# EAGLE board Tiny Tetris v1.2 (EAGLE 7.0.0)
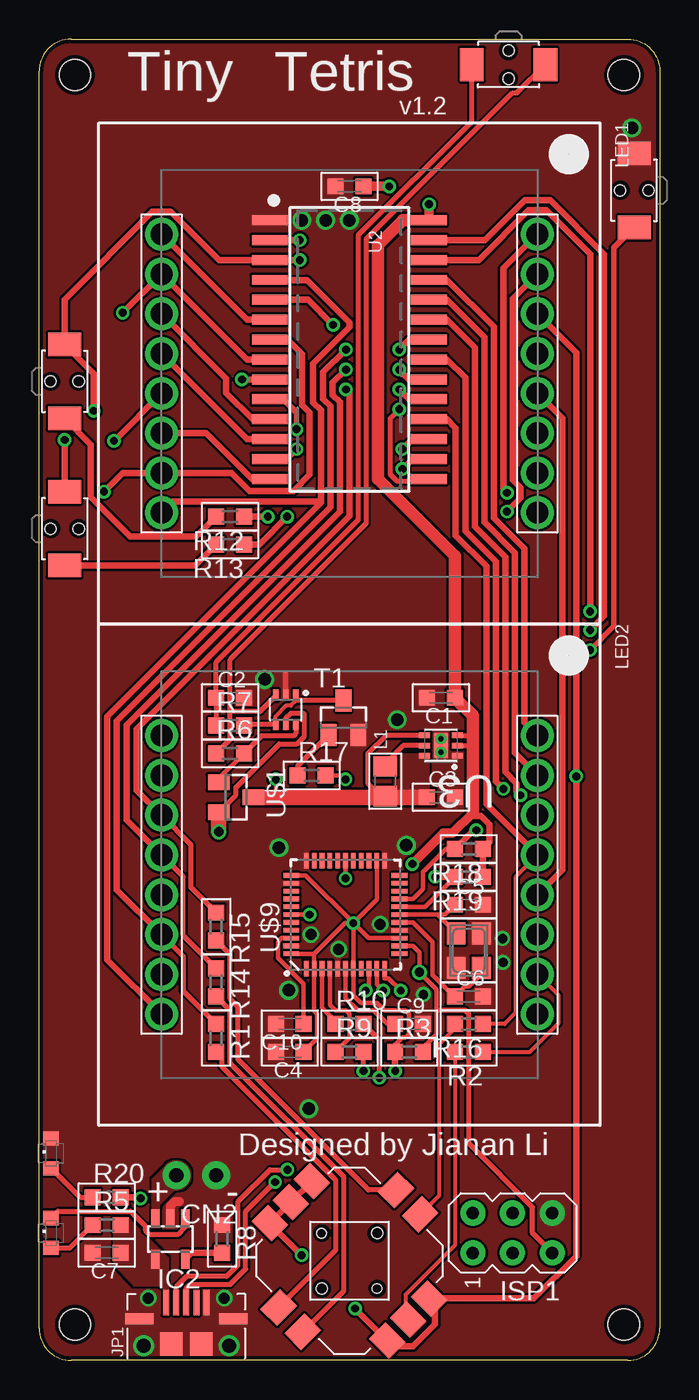
[diagram p0: board, top side]
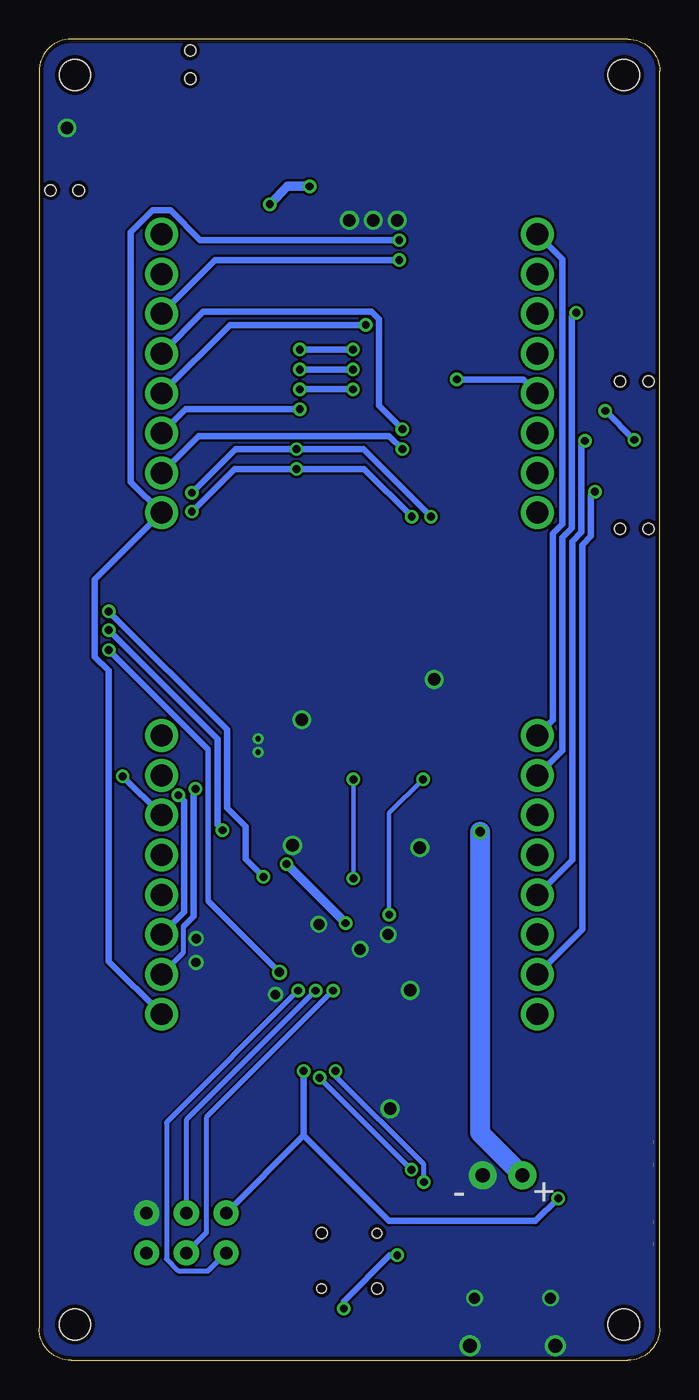
[diagram p1: board, bottom side, seen from below]

Size 39.62 x 84.33 mm. Coordinates in mm from the lower left corner, seen from the top.
Outline: 0,2.03 0,82.3 arc-90 2.03,84.33 37.59,84.33 arc-90 39.62,82.3 39.62,2.03 arc-90 37.59,0 2.03,0 arc-90 0,2.03
Copper layers (1*16): Top 0.0356mm / dielectric 1.5011mm / Bottom 0.0356mm
Design rules "OSH Park *": minimum track width 6mil, minimum drill 13mil, track to track 6mil, track to pad 6mil, pad to pad 6mil, via to via 6mil, smd to smd 6mil, copper to edge 10mil, drill to drill 6mil, minimum pad ring 7mil, minimum via ring 7mil, stop-mask expansion 0mil, vias tented up to drill 40mil, thermal gap 10mil
Holes 2 mm at 37.34,2.29 37.34,82.04 2.29,2.29 2.29,82.04

## Footprints (pad centres in the part's own frame; a part is rotated, then mirrored left to right if it is on the bottom)
TACT-ALPS-SKRELGE010 = smd 1.5 x 2.1: P$1 -2.35,0; P$2 2.35,0 | hole 0.7: 0,0.9; 0,-0.9
C0603K = smd 1.016 x 1.016: 1 -0.889,0; 2 0.889,0
1X02_NO_SILK = drill 0.9 pad 1.778: 1 0,0; 2 2.54,0
SOT23-5L = smd 0.55 x 1.2: 1 -0.95,-1.3; 2 0,-1.3; 3 0.95,-1.3; 4 0.95,1.3; 5 -0.95,1.3
AVRISP = drill 0.8 pad 1.6: 1 -1.27,2.54; 2 1.27,2.54; 3 -1.27,0; 4 1.27,0; 5 -1.27,-2.54; 6 1.27,-2.54
JOYSTICK-NOKIA-3230-LONG-PAD = smd 1.8 x 1.5 rotated 315: 1 -2.404,5.091; 2 -5.091,2.404; 3 2.404,-5.091; 4 5.091,-2.404; 5 -3.748,3.748; E 3.748,-3.748 | smd 1.5 x 1.8 rotated 315: A 2.97,4.525; B -4.525,-2.97; C -2.97,-4.525; D 4.525,2.97 | hole 0.7: 1.768,1.768; -1.768,-1.768 | hole 0.6: -1.768,1.768; 1.768,-1.768
MICRO-USB-FCI-10103594 = smd 0.38 x 1.6: 1 -1.3,3.561; 2 -0.65,3.561; 3 0,3.561; 4 0.65,3.561; 5 1.3,3.561 | drill 0.7: P$1 -2.425,3.841; P$2 2.425,3.841 | drill 0.9: P$3 -2.725,0.811; P$4 2.725,0.811 | smd 1.425 x 1.5: P$5 -0.963,0.901; P$6 0.963,0.901 | smd 1.825 x 0.7: P$7 -3,2.511; P$8 3,2.511
0805 = smd 1.3 x 1.5: 1 -0.95,0; 2 0.95,0
LED-MATRIX-8X8-MONO-SQUARE = drill 1.4 pad 2.032: 1 -8.89,-12; 2 -6.35,-12; 3 -3.81,-12; 4 -1.27,-12; 5 1.27,-12; 6 3.81,-12; 7 6.35,-12; 8 8.89,-12; 9 8.89,12; 10 6.35,12; 11 3.81,12; 12 1.27,12; 13 -1.27,12; 14 -3.81,12; 15 -6.35,12; 16 -8.89,12
LED-0603-SIDEVIEW = smd 0.9 x 1: P$1 -0.95,0; P$2 0.95,0
NX3225 = smd 1.4 x 1.2: 1 -1.1,-0.8; 2 1.1,-0.8; 3 1.1,0.8; 4 -1.1,0.8
R0603 = smd 1.016 x 1.016: 1 -0.889,0; 2 0.889,0
SOT23-BEC = smd 1 x 1.4: B -0.95,-1.1; C 0,1.1; E 0.95,-1.1
SOP28_300MIL = smd 0.635 x 2.286: P$1 -8.255,-5.08; P$2 -6.985,-5.08; P$3 -5.715,-5.08; P$4 -4.445,-5.08; P$5 -3.175,-5.08; P$6 -1.905,-5.08; P$7 -0.635,-5.08; P$8 0.635,-5.08; P$9 1.905,-5.08; P$10 3.175,-5.08; P$11 4.445,-5.08; P$12 5.715,-5.08; P$13 6.985,-5.08; P$14 8.255,-5.08; P$15 8.255,5.08; P$16 6.985,5.08; P$17 5.715,5.08; P$18 4.445,5.08; P$19 3.175,5.08; P$20 1.905,5.08; P$21 0.635,5.08; P$22 -0.635,5.08; P$23 -1.905,5.08; P$24 -3.175,5.08; P$25 -4.445,5.08; P$26 -5.715,5.08; P$27 -6.985,5.08; P$28 -8.255,5.08
SON65P200X200X80-7N = smd 0.7 x 0.35: 1 -1.05,0.65; 2 -1.05,0; 3 -1.05,-0.65; 4 1.05,-0.65; 5 1.05,0; 6 1.05,0.65 | smd 0.9 x 1.6: 7 0,0 | drill 0.33: 8 0,0.43; 9 0,-0.43
SOT23 = smd 1 x 1.4: 1 -0.95,-1.1; 2 0.95,-1.1; 3 0,1.1
SC-70-6 = smd 0.35 x 0.7: 1 -0.65,-0.95; 2 0,-0.95; 3 0.65,-0.95; 4 0.65,0.95; 5 0,0.95; 6 -0.65,0.95
SPARKFUN-DIGITALIC_QFN-44-NOPAD = smd 1 x 0.3: 1 -3.45,2.5; 2 -3.45,2; 3 -3.45,1.5; 4 -3.45,1; 5 -3.45,0.5; 6 -3.45,0; 7 -3.45,-0.5; 8 -3.45,-1; 9 -3.45,-1.5; 10 -3.45,-2; 11 -3.45,-2.5; 23 3.45,-2.5; 24 3.45,-2; 25 3.45,-1.5; 26 3.45,-1; 27 3.45,-0.5; 28 3.45,0; 29 3.45,0.5; 30 3.45,1; 31 3.45,1.5; 32 3.45,2; 33 3.45,2.5 | smd 0.3 x 1: 12 -2.5,-3.45; 13 -2,-3.45; 14 -1.5,-3.45; 15 -1,-3.45; 16 -0.5,-3.45; 17 0,-3.45; 18 0.5,-3.45; 19 1,-3.45; 20 1.5,-3.45; 21 2,-3.45; 22 2.5,-3.45; 34 2.5,3.45; 35 2,3.45; 36 1.5,3.45; 37 1,3.45; 38 0.5,3.45; 39 0,3.45; 40 -0.5,3.45; 41 -1,3.45; 42 -1.5,3.45; 43 -2,3.45; 44 -2.5,3.45

## Placement (x,y rotation side)
BRIGHTNESS-DOWN  [TACT-ALPS-SKRELGE010]  1.63,53.09 270 top
BRIGHTNESS-UP  [TACT-ALPS-SKRELGE010]  1.63,62.48 270 top
C1  10uF  [C0603K]  25.65,42.29 180 top
C2  0.1uF  [C0603K]  12.19,42.29 0 top
C3  10uF  [C0603K]  25.65,35.94 0 top
C4  0.1uF  [C0603K]  16,19.69 180 top
C5  22pF  [C0603K]  27.43,29.08 0 top
C6  22pF  [C0603K]  27.43,23.24 0 top
C7  4.7uF  [C0603K]  4.32,6.86 180 top
C8  0.1uF  [C0603K]  19.81,74.93 180 top
C9  1uF  [C0603K]  23.62,21.46 0 top
C10  0.1uF  [C0603K]  16,21.46 180 top
CN2  M02-JST-2MM-SMT  [1X02_NO_SILK]  11.3,11.81 180 top
IC2  MCP73831/OT  [SOT23-5L]  8.38,7.75 180 top
ISP1  AVRISP-6  [AVRISP]  30.23,8.13 90 top
JOYSTICK-  SWITCH-NAVI-LONG-PAD  [JOYSTICK-NOKIA-3230-LONG-PAD]  19.81,6.35 0 top
JP1  USB-MICRO-B  [MICRO-USB-FCI-10103594]  9.4,0.13 0 top
L1  1uH  [0805]  22.1,36.96 90 top
LED1  LED-MATRIX-8X8-MONO-SQUARE  [LED-MATRIX-8X8-MONO-SQUARE]  19.81,62.99 270 top
LED2  LED-MATRIX-8X8-MONO-SQUARE  [LED-MATRIX-8X8-MONO-SQUARE]  19.81,30.99 270 top
LED3  Red  [LED-0603-SIDEVIEW]  0.76,8.13 90 top
LED4  Green  [LED-0603-SIDEVIEW]  0.76,13.21 90 top
Q1  [NX3225]  27.43,26.16 270 top
R1  10k  [R0603]  11.3,20.57 270 top
R2  10k  [R0603]  27.43,19.69 180 top
R3  10k  [R0603]  23.62,19.69 0 top
R5  1k  [R0603]  4.32,8.64 0 top
R6  100k  [R0603]  12.19,38.73 0 top
R7  100k  [R0603]  12.19,40.51 0 top
R8  2k  [R0603]  11.68,7.75 270 top
R9  22  [R0603]  19.81,19.69 0 top
R10  22  [R0603]  19.81,21.46 0 top
R12  10k  [R0603]  12.19,53.85 180 top
R13  10k  [R0603]  12.19,52.07 180 top
R14  10k  [R0603]  11.3,24.13 270 top
R15  10k  [R0603]  11.3,27.69 270 top
R16  10k  [R0603]  27.43,21.46 180 top
R17  1k  [R0603]  17.4,37.34 0 top
R18  10k  [R0603]  27.43,32.64 180 top
R19  10k  [R0603]  27.43,30.86 180 top
R20  470  [R0603]  4.32,10.41 0 top
S1  POWER  [TACT-ALPS-SKRELGE010]  29.97,82.7 180 top
S2  BUTTON  [TACT-ALPS-SKRELGE010]  38,74.68 90 top
T1  [SOT23-BEC]  19.43,41.02 0 top
U2  28-SOIC  [SOP28_300MIL]  19.81,64.52 270 top
U3  TPS61240DRVR  [SON65P200X200X80-7N]  25.65,39.24 180 top
U$1  IRLML6402  [SOT23]  12.57,35.94 270 top
U$2  NC7WZ14  [SC-70-6]  15.75,41.53 180 top
U$9  ATMEGA32U4QFN2  [SPARKFUN-DIGITALIC_QFN-44-NOPAD]  19.56,28.45 90 top

## Library data of the parts
BRIGHTNESS-DOWN BRIGHTNESS-UP JOYSTICK- JP1 LED1-LED4 S1 S2 U$1 U$2 = Jianan Li
C1-C10 R1-R3 R5-R10 R12-R20 = resistor
CN2 = SparkFun-Connectors
IC2 ISP1 Q1 = adafruit
L1 U2 = microbuilder
T1 = transistor
U3 = Texas Instruments_By_element14_Batch_1; MPN: TPS61240DRVR; OC_FARNELL: -; OC_NEWARK: 25R0113; PACKAGE: SON-6; SUPPLIER: Texas Instruments
U$9 = SparkFun-DigitalIC

## Nets
A0: LED2.11 U2.P$23
A1: LED2.15 U2.P$24
A2: LED2.16 U2.P$25
D+: JP1.3 R9.2
D-: JP1.2 R10.2
GND: C1.2 C2.2 C3.2 C4.2 C5.2 C6.2 C7.2 C8.2 C9.2 C10.2 CN2.1 IC2.2 ISP1.6 JP1.5 JP1.P$1 JP1.P$2 JP1.P$3 JP1.P$4 JP1.P$5 JP1.P$6 JP1.P$7 JP1.P$8 LED4.P$2 Q1.2 Q1.4 R8.1 S2.P$2 T1.E U2.P$1 U3.1 U3.7 U3.8 U3.9 U$2.2 U$9.5 U$9.15 U$9.23 U$9.33 U$9.35 U$9.43
K1: LED2.6 R1.1 U2.P$22
K2: LED2.10 R2.1 U2.P$21
K3: LED2.4 R14.1 U2.P$20
K4: LED2.3 R15.1 U2.P$19
K5: LED2.13 R16.1 U2.P$18
K6: LED1.16 R12.1 U2.P$17
K7: LED1.15 R13.1 U2.P$16
K8: LED1.11 U2.P$15
KILL: R17.2 U$9.28
KS0: BRIGHTNESS-DOWN.P$1 BRIGHTNESS-UP.P$1 JOYSTICK-.1 JOYSTICK-.2 JOYSTICK-.3 JOYSTICK-.4 JOYSTICK-.5 LED1.14 LED2.14 U2.P$3
MISO: ISP1.1 U$9.11
MOSI: ISP1.4 U$9.10
N$1: LED1.5 LED2.5 U2.P$9
N$2: LED3.P$1 R5.1
N$3: JOYSTICK-.C R14.2
N$4: R6.2 U$1.1 U$2.6
N$5: R17.1 T1.B
N$6: R6.1 S1.P$1 U$2.3
N$7: JOYSTICK-.E R2.2
N$8: LED1.9 LED2.9 U2.P$2
N$9: JOYSTICK-.D R16.2
N$10: C2.1 R7.1 S1.P$2
N$11: JOYSTICK-.B R1.2
N$12: R7.2 T1.C U$2.1 U$2.4
N$13: JOYSTICK-.A R15.2
N$15: C10.1 U$9.42
N$16: R9.1 U$9.4
N$17: IC2.1 LED3.P$2
N$18: IC2.5 R8.2
N$19: R10.1 U$9.3
N$20: C9.1 U$9.6
N$21: BRIGHTNESS-UP.P$2 R12.2
N$22: LED1.3 U2.P$11
N$23: LED1.4 U2.P$12
N$24: LED1.10 U2.P$13
N$25: LED1.6 U2.P$14
N$26: BRIGHTNESS-DOWN.P$2 R13.2
N$27: LED4.P$1 R20.1
N$29: L1.2 U3.5
N$30: LED1.8 LED2.8 U2.P$4
N$31: C5.1 Q1.1 U$9.17
N$32: LED1.12 LED2.12 U2.P$5
N$33: LED1.1 LED2.1 U2.P$6
N$34: LED1.7 LED2.7 U2.P$7
N$35: LED1.2 LED2.2 U2.P$8
N$36: C6.1 Q1.3 U$9.16
ROW15: LED1.13 U2.P$10
RST: ISP1.5 R3.2 S2.P$1 U$9.13
SCK: ISP1.3 U$9.9
SCL: R19.2 U2.P$26 U$9.18
SDA: R18.2 U2.P$27 U$9.19
VBATT: CN2.2 IC2.3 U$1.2 U$2.5
VBATT_IN: C3.1 L1.1 U3.4 U3.6 U$1.3 U$9.39
VDD: C1.1 C4.1 C8.1 ISP1.2 R3.1 R18.1 R19.1 R20.2 U2.P$28 U3.2 U3.3 U$9.2 U$9.7 U$9.14 U$9.24 U$9.34 U$9.44
VUSB: C7.1 IC2.4 JP1.1 R5.2

## Tracks (layer width: path | path; a pad name or v marks a point on that pad's centre or on a via)
A0  (via drill 0.5)
  Top 0.406: U2.P$23 26.04,66.42 27.81,64.64 27.81,53.21 29.77,51.26 29.77,37.54 30.48,36.83 30.48,36.32 v30.73,36.07
  Bottom 0.406: v30.73,36.07 30.38,35.71 30.38,28.61 LED2.11
A1
  Top 0.406: U2.P$24 26.04,67.69 28.42,65.3 28.42,53.49 30.38,51.54 30.38,38.77 LED2.15
A2
  Top 0.406: U2.P$25 26.04,68.96 29.03,65.96 29.03,53.77 30.99,51.82 30.99,40.7 LED2.16
D+  (via drill 0.5)
  Top 0.305: JP1.3 9.4,4.6 9.65,4.85 12.19,4.85 13.18,5.84 13.18,9.5 v15.06,11.38 | v20.7,18.47 R9.2
  Bottom 0.305: v15.06,11.38 15.06,12.5 20.7,18.14 v20.7,18.47
D-  (via drill 0.5)
  Top 0.305: JP1.2 8.75,4.68 9.42,5.36 11.96,5.36 12.68,6.07 12.68,10.11 14.73,12.17 v15.85,12.17 | v21.72,18.03 21.72,20.45 R10.2
  Bottom 0.305: v15.85,12.17 v21.72,18.03
GND  (via drill 0.6, 0.7, 0.8)
  Top 0.356: U$2.2 15.75,43.82
  Top 0.559: IC2.2 8.38,9.86 8.66,10.14 8.94,10.14
  other vias: 17.22,16.05 14.4,43.46 16.76,72.77 37.85,78.66 21.77,27.84 15.32,32.72 23.44,32.87 22.86,40.89 15.93,23.62 19.13,26.24 17.35,27.18 24.54,23.34 29.62,25.4 29.59,26.92 18.29,72.77 19.81,72.77
  pour Bottom (no thermals): 2.03,84.33 arc90 0,82.3 0,2.03 arc90 2.03,0 37.59,0 arc90 39.62,2.03 39.62,82.3 arc90 37.59,84.33
  pour Top (rank 6, no thermals): 2.03,84.33 arc90 0,82.3 0,2.03 arc90 2.03,0 37.59,0 arc90 39.62,2.03 39.62,82.3 arc90 37.59,84.33
K1  (via drill 0.5)
  Top 0.305: LED2.6 9.2,25.8 9.2,23.57 R1.1
  Top 0.406: LED2.6 4.95,30.04 4.95,40.82 18.59,54.46 18.59,60.91 18.14,61.37 18.14,63.07 v19.58,64.52 | v22.99,64.52 23.62,65.15 U2.P$22
  Bottom 0.406: v19.58,64.52 v22.99,64.52
K2  (via drill 0.5)
  Top 0.254: R2.1 31.32,19.69 33.17,21.54 33.17,23.28 LED2.10
  Top 0.406: U2.P$21 26.04,63.88 27.2,62.71 27.2,52.93 29.16,50.98 29.16,36.96 v29.64,36.47
  Bottom 0.305: 30.38,27.74 30.43,27.74 30.43,26.02 LED2.10
  Bottom 0.406: v29.64,36.47 29.77,36.35 29.77,28.35 30.38,27.74
K3  (via drill 0.5)
  Top 0.305: R14.1 9.2,27.13 9.2,30.88 LED2.4
  Top 0.406: LED2.4 5.59,34.48 5.59,40.56 19.2,54.18 19.2,61.16 18.75,61.62 18.75,62.41 v19.58,63.25 | v22.99,63.25 23.62,62.61 U2.P$20
  Bottom 0.406: v19.58,63.25 v22.99,63.25
K4  (via drill 0.5)
  Top 0.305: R15.1 9.7,30.18 9.7,32.91 LED2.3
  Top 0.406: LED2.3 6.22,36.39 6.22,40.31 19.81,53.9 19.81,61.75 v19.58,61.98 | v22.99,61.98 23.62,61.34 U2.P$19
  Bottom 0.406: v19.58,61.98 v22.99,61.98
K5
  Top 0.254: LED2.13 30.46,30.9 30.46,22.2 29.72,21.46 R16.1
  Top 0.406: U2.P$18 26.04,60.07 26.59,59.51 26.59,52.65 28.55,50.7 28.55,35.52 LED2.13
K6  (via drill 0.5)
  Top 0.406: U2.P$17 23.83,58.8 v23.19,58.17 | LED1.16 29.64,69.71 29.64,55.6 v29.87,55.37 | v14.61,53.85 R12.1
  Bottom 0.406: v14.61,53.85 18.92,58.17 v23.19,58.17 27.08,58.17 v29.87,55.37
K7  (via drill 0.5)
  Top 0.406: U2.P$16 23.83,57.53 v23.19,56.9 | LED1.15 30.25,67.78 30.25,56.19 30.73,55.7 30.73,55.04 v29.87,54.18 | v15.84,53.85 14.06,52.07 R13.1
  Bottom 0.406: v29.87,54.18 27.15,56.9 v23.19,56.9 18.88,56.9 v15.84,53.85
K8  (via drill 0.5)
  Top 0.305: v22.99,60.71 22.4,60.12 22.4,56.57 22.86,56.11 23.52,56.11 23.67,56.26 U2.P$15
  Bottom 0.406: LED1.11 30.29,60.71 v22.99,60.71
KEEPOUT
  pour Top (no thermals): 15.42,42.75 16.08,42.75 16.08,42.21 15.42,42.21
  pour Top (no thermals): 9.78,4.6 10.24,4.6 10.24,2.97 9.78,2.97
  pour Top: 8,9.6 8.79,9.6 8.79,8.36 8,8.36
  pour Top: 26.43,39.41 26.97,39.41 26.97,39.04 26.43,39.04
KILL  (via drill 0.5)
  Top 0.279: U$9.28 v19.56,30.76 | v19.56,37.08 19.3,37.34 R17.2
  Bottom 0.279: v19.56,30.76 v19.56,37.08
KS0  (via drill 0.5)
  Top 0.406: v16.64,70.23 U2.P$3 11.48,70.23 8.41,73.3 7.21,73.3 1.63,67.72 BRIGHTNESS-UP.P$1 3.48,62.98 v3.48,60.6 | LED1.14 34.29,64.32 v34.29,37.28 34.29,6.66 31.58,3.95 JOYSTICK-.4 25.27,3.58 25.27,2.29 23.88,0.89 22.59,0.89 JOYSTICK-.3 v20.17,3.3 | BRIGHTNESS-DOWN.P$1 v1.63,58.75 | JOYSTICK-.1 JOYSTICK-.5 | JOYSTICK-.5 | JOYSTICK-.5 | JOYSTICK-.5 JOYSTICK-.2 v16.76,6.71
  Bottom 0.406: LED2.14 v34.29,37.28 | v16.64,70.23 28.38,70.23 LED1.14 | v3.48,60.6 v1.63,58.75 | v16.76,6.71 17.24,6.71 20.17,3.78 v20.17,3.3
MISO  (via drill 0.5)
  Top 0.279: U$9.11 22.06,24.38 22.3,24.38 v23.09,23.6
  Bottom 0.305: ISP1.1 28.85,5.69 30.71,5.69 31.5,6.48 31.5,15.19 v23.09,23.6
MOSI  (via drill 0.5)
  Top 0.279: U$9.10 21.56,24.01 v21.97,23.6
  Bottom 0.305: v21.97,23.6 30.23,15.34 ISP1.4
N$1  (via drill 0.5)
  Top 0.406: LED1.5 v4.78,58.69 | v12.95,62.61 U2.P$9
  Bottom 0.406: LED2.5 5.59,31.94 5.59,52.27 5,52.86 5,58.46 v4.78,58.69 | LED1.5 8.7,62.61 v12.95,62.61
N$2
  Top 0.305: LED3.P$1 1.97,7.18 R5.1
N$3
  Top 0.305: JOYSTICK-.C 19.46,4.44 19.46,11.71 12.17,19 12.17,22.38 R14.2
N$4
  Top 0.279: U$1.1 11.47,37.13 R6.2
  Top 0.305: U$2.6 16.4,40.02 16.23,39.85 14.2,39.85 R6.2 13.06,38.73 | U$1.1 11.49,36.89
N$5
  Top 0.305: T1.B 16.51,37.95 R17.1
N$6
  Top 0.305: S1.P$1 30.52,80.9 30.23,80.9 20.88,71.55 20.88,53.42 12.19,44.73 12.19,41.4 | R6.1 12.19,39.62 12.19,41.4 | U$2.3 15.1,42.4 14.1,41.4 12.19,41.4
  Top 0.406: 32.53,82.7 S1.P$1
N$7
  Top 0.254: R2.2 26.54,7.34 23.39,4.19 23.39,2.77 JOYSTICK-.E
N$8  (via drill 0.5)
  Top 0.406: v16.64,71.5 U2.P$2
  Bottom 0.406: v16.64,71.5 29.34,71.5 31.24,73.41 32.39,73.41 33.78,72.01 33.78,56.07 LED1.9 36.07,49.85 36.07,44.91 35.18,44.02 35.18,25.47 LED2.9
N$9
  Top 0.254: R16.2 26.54,21.18 25.53,20.17 25.53,10.51 JOYSTICK-.D
  Top 0.406: JOYSTICK-.D 24.36,9.34
N$10
  Top 0.305: S1.P$2 27.62,79.06 20.37,71.81 20.37,53.65 11.3,44.58 C2.1 R7.1
N$11
  Top 0.305: JOYSTICK-.B 18.95,7.04 18.95,11.48 11.66,18.77 11.66,19.33 R1.2
N$12
  Top 0.254: U$2.1 16.4,42.13 16.39,42.12 16.05,41.78 15.77,41.78 15.1,41.11 U$2.4
  Top 0.305: T1.C 16.39,42.12 16.39,42.47 U$2.1 | U$2.4 13.15,40.58 R7.2
N$13
  Top 0.305: JOYSTICK-.A 21.03,10.88 12.68,19.23 12.68,22.61 12.17,23.11 12.17,25.93 R15.2
N$15
  Top 0.279: U$9.42 15.47,26.95 15.24,26.72 15.24,25.68 16.89,24.03 C10.1
N$16
  Top 0.279: R9.1 19.81,20.57 19.81,22.1 19.58,22.33 18.92,22.33 18.56,22.69 U$9.4
N$17
  Top 0.305: IC2.1 9.33,8.49 8.89,8.05 7.04,8.05 6.78,8.31 6.78,8.59 5.84,9.52 1.21,9.52 LED3.P$2
N$18
  Top 0.406: R8.2 9.74,6.86 IC2.5
N$19
  Top 0.279: U$9.3 18.06,22.51 18.92,21.64 R10.1
N$20
  Top 0.279: 22.48,21.46 22.23,21.46 21.36,22.33 20.35,22.33 19.56,23.11 U$9.6
  Top 0.305: C9.1 22.48,21.46
N$21
  Top 0.406: BRIGHTNESS-UP.P$2 3.3,58.46 3.3,55.09 5.82,52.58 10.03,52.58 R12.2
N$22
  Top 0.406: LED1.3 11.94,62.68 11.94,61.75 13.61,60.07 U2.P$11 13.97,60.07
N$23
  Top 0.406: LED1.4 13.27,58.8 U2.P$12
N$24  (via drill 0.5)
  Top 0.406: v16.43,58.17 15.8,57.53 U2.P$13
  Bottom 0.406: LED1.10 29.45,59 17.27,59 v16.43,58.17
N$25
  Top 0.406: LED1.6 10.67,59.18 13.59,56.26 U2.P$14
N$26
  Top 0.406: BRIGHTNESS-DOWN.P$2 9.97,50.74 R13.2
N$27
  Top 0.305: LED4.P$1 2.61,10.41 R20.1
N$29
  Top 0.305: U3.5 23.24,39.24 22.1,38.1 L1.2
N$30
  Top 0.406: LED2.8 4.34,25.57 4.34,41.1 17.98,54.74 17.98,54.81 | U2.P$4 17.09,68.96 19.81,66.24 19.81,65.94 17.5,63.63 17.5,61.14 17.98,60.66 17.98,54.81 | LED1.8 8.52,54.81 17.98,54.81
N$31
  Top 0.279: C5.1 25.91,28.45 25.45,28.45 | U$9.17 24.38,28.45 25.45,28.45 | Q1.1 25.45,28.45
N$32  (via drill 0.5)
  Top 0.406: LED1.12 33.4,60.13 33.4,31.31 LED2.12 | U2.P$5 17.17,67.69 v18.77,66.09
  Bottom 0.406: v18.77,66.09 27.44,66.09 LED1.12
N$33
  Top 0.406: U2.P$6 13.27,66.42 LED1.1
  Bottom 0.406: LED1.1 6.22,70.29 6.22,53.37 6.83,52.76 6.83,40.86 LED2.1
N$34  (via drill 0.5)
  Top 0.406: v4.14,55.45 5.33,56.64 LED1.7 12.29,56.64 13.44,55.5 16.23,55.5 17.27,56.54 17.27,60.48 16.79,60.96 16.79,64.21 15.85,65.15 U2.P$7
  Bottom 0.406: LED2.7 4.95,27.5 4.95,52.05 4.39,52.6 4.39,55.19 v4.14,55.45
N$35  (via drill 0.5)
  Top 0.406: U2.P$8 13.27,63.88 LED1.2 v5.33,66.86
  Bottom 0.406: LED2.2 6.22,38.93 6.22,52.5 5.61,53.11 5.61,66.59 v5.33,66.86
N$36
  Top 0.279: Q1.3 28.23,24.68 27.43,23.88 27.18,23.88 C6.1 26.49,23.24 25.12,24.61 25.12,26.7 23.87,27.95 U$9.16
ROW15  (via drill 0.5)
  Top 0.356: v16.43,59.44 16.43,60.48 15.57,61.34 U2.P$10
  Bottom 0.406: v16.43,59.44 17.93,60.94 17.93,66.45 18.42,66.93 29.15,66.93 LED1.13
RST  (via drill 0.5, 0.6)
  Top 0.279: R3.2 24.51,19.94 25.38,20.8 25.38,22.35 25.38,23.67 v24.28,24.77 24.28,26.04 23.87,26.45 U$9.13
  Top 0.305: ISP1.5 31.5,8.13 31.5,9.78 27.43,13.84 27.43,22.12 27.2,22.35 25.38,22.35
  Top 0.356: S2.P$1 36.7,71.03 36.7,46.86 v35.18,45.34
  Bottom 0.356: v35.18,45.34 28.83,38.99 28.83,29.31 v24.28,24.77
SCK  (via drill 0.5)
  Top 0.279: U$9.9 21.06,23.8 v20.85,23.6
  Bottom 0.305: ISP1.3 28.96,8.13 28.96,15.49 v20.85,23.6
SCL  (via drill 0.5)
  Top 0.279: R19.2 24.63,28.95 U$9.18
  Top 0.406: v35.18,47.8 35.18,70.61 32.39,73.41 31.24,73.41 28.07,70.23 U2.P$26 | R19.2 v25.3,30.86
  Bottom 0.406: v35.18,47.8 27.64,40.26 27.64,35.26 26.44,34.06 26.44,32 v25.3,30.86
SDA  (via drill 0.5)
  Top 0.279: R18.2 25.98,32.64 24.51,31.17 24.51,30.1 23.86,29.45 U$9.19
  Top 0.406: U2.P$27 28.47,71.5 31.01,74.04 32.64,74.04 36.07,70.61 36.07,47.5 v35.18,46.61 | v27.91,33.83 27.74,33.83 R18.2
  Bottom 0.406: v35.18,46.61 28.25,39.68 28.25,34.16 v27.91,33.83
VBATT  (via drill 0.6)
  Top 0.305: U$2.5 15.75,40.97 16.08,41.3 16.87,41.3 16.94,41.22 16.94,39.83 16.46,39.34 15.34,39.34 12.57,36.58 12.57,36.09 U$1.2
  Top 1.003: U$1.2 v11.47,33.74
  Bottom 1.27: CN2.2 11.47,14.52 v11.47,33.74
  pour Top (no thermals): 7.24,9.55 7.24,11.56 8.13,12.45 arc-231 8.66,10.92 7.62,9.88 7.62,9.55
VBATT_IN  (via drill 0.5)
  Top 0.279: U$9.39 v17.27,28.45 | v15.11,37.08 15.11,35.94
  Top 0.305: U3.4 22.16,39.89 20.98,38.71 20.98,36.86 21.83,36.01 L1.1
  Top 0.813: L1.1 22.1,35.94
  Top 1.003: C3.1 22.1,35.94 15.11,35.94 U$1.3
  Bottom 0.279: v15.11,37.08 17.27,34.93 v17.27,28.45
  pour Top (no thermals): 24.87,38.68 22.71,38.68 22.71,35.51 24.87,35.51
VDD  (via drill 0.5)
  Top 0.279: U$9.44 17.56,25.95 | v20.06,27.91 21.56,29.41 U$9.24 | U$9.34 17.02,30.95 v20.06,27.91 | U$9.14 21.02,26.95 v20.06,27.91 | v20.06,27.91 U$9.7 20.06,23.3 20.55,22.81 21.57,22.81 22.05,22.33 23.39,22.33 23.6,22.12 23.6,20.8 23.39,20.6 23.19,20.6 22.73,20.14 R3.1 | 17.56,25.95 U$9.2 17.56,22.32 17.76,22.12 17.76,20.55 C4.1 | 17.56,25.95 19.52,27.91 v20.06,27.91
  Top 0.305: U3.3 27.69,39.89 | U3.2 27.69,39.24
  Top 0.406: 23.5,72.77 U2.P$28 | v6.48,10.34 6.4,10.41 R20.2 | R3.1 v22.73,18.47 | R19.1 R18.1 28.75,33.07 28.75,34.19 28.19,34.75 27.74,34.75 27.74,34.9 27.69,34.95
  Top 0.61: C8.1 v22.35,74.93 | v24.89,73.79 U2.P$28 | v23.83,31.67 25.81,33.66 26.39,33.66 27.69,34.95
  Top 0.813: 23.5,72.77 23.24,72.77 21.64,71.17 21.64,56.24 26.54,51.33 C1.1 27.69,41.15 27.69,39.89 27.69,39.24 27.69,34.95
  Bottom 0.406: v6.48,10.34 7.93,8.89 17.27,8.89 22.73,14.35 | 22.73,14.35 ISP1.2 | v22.73,18.47 22.73,14.35
  Bottom 0.61: v22.35,74.93 23.75,74.93 v24.89,73.79 | v23.83,31.67 v20.06,27.91
VUSB
  pour Top (no thermals): 8.2,4.37 8.2,6.55 5.69,9.07 4.78,9.07 4.78,6.1 6.07,4.8 7.7,4.8 8,4.5 8,4.37

## Text on the board
tPlace: Tiny | Tetris | v1.2 | Designed by Jianan Li | + | -
bPlace: + | -